# Altium PCB Recovery.PcbDoc
Units mil, origin at the board's own origin, x right, y up, seen from the top; angles counter-clockwise.
Board outline 2095 x 1230 mil, 4 copper layers (Top, GND, POWER, Btm), stack 30.617 mil thick; 21 components, 22 nets, 91 pads, 15 vias.
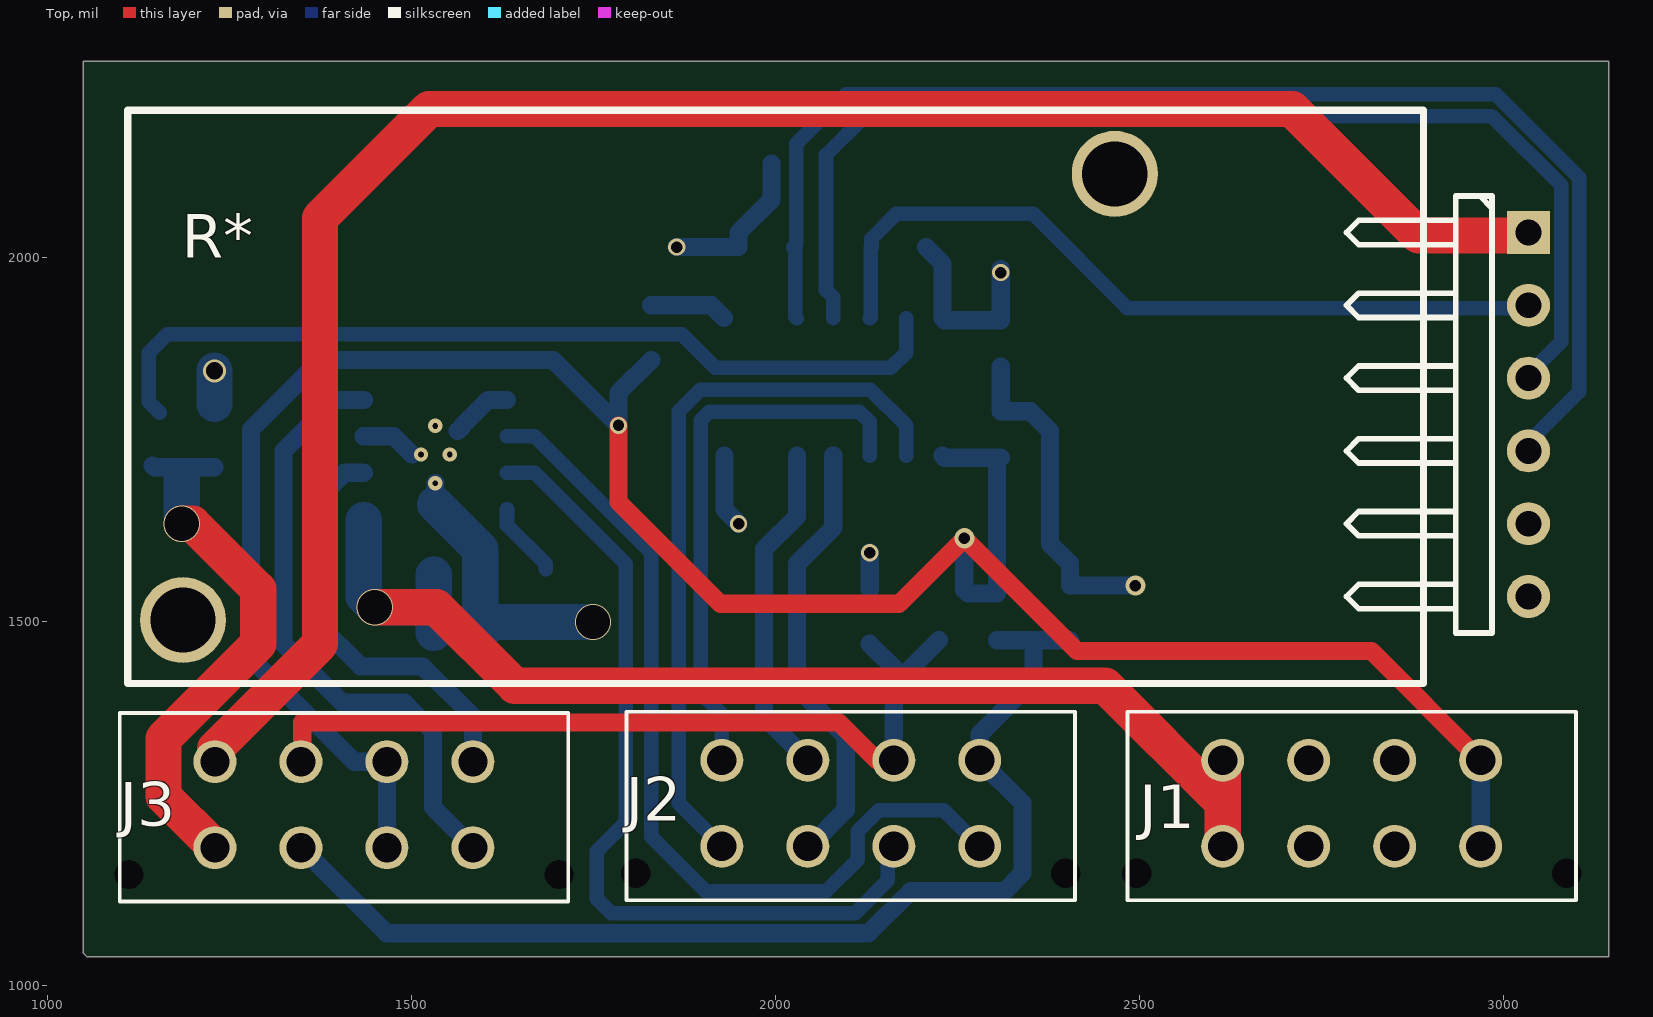
[diagram p0: Top view]
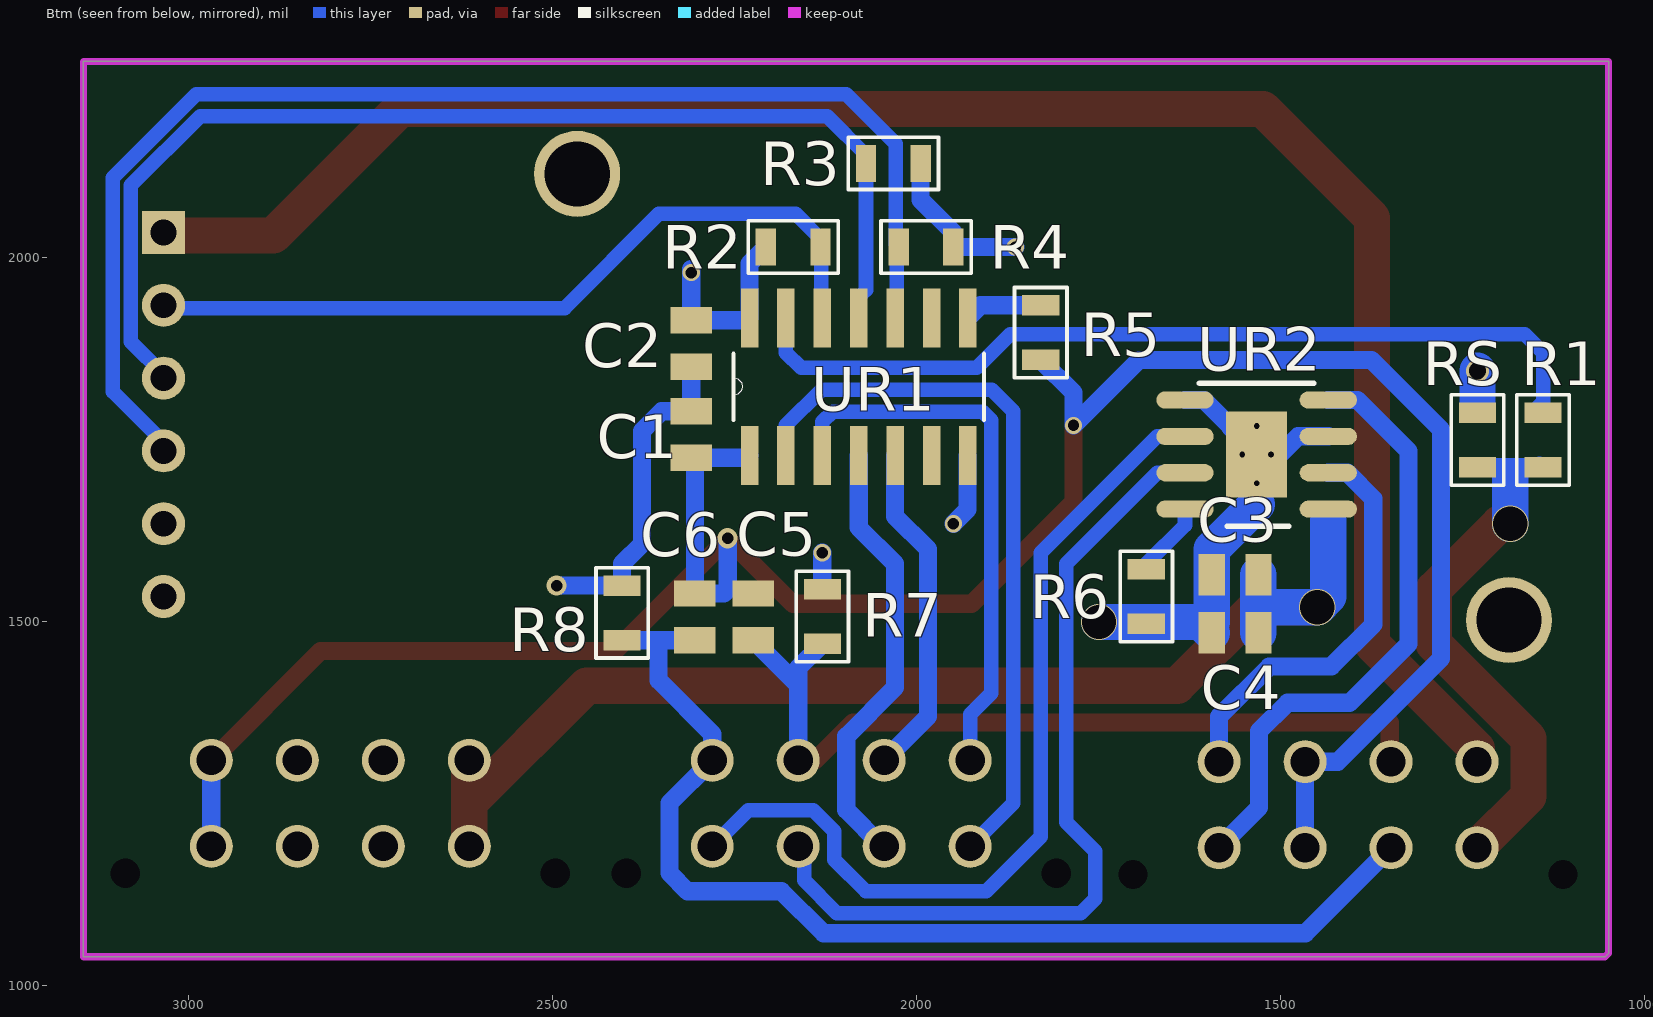
[diagram p1: Btm view, seen from below]
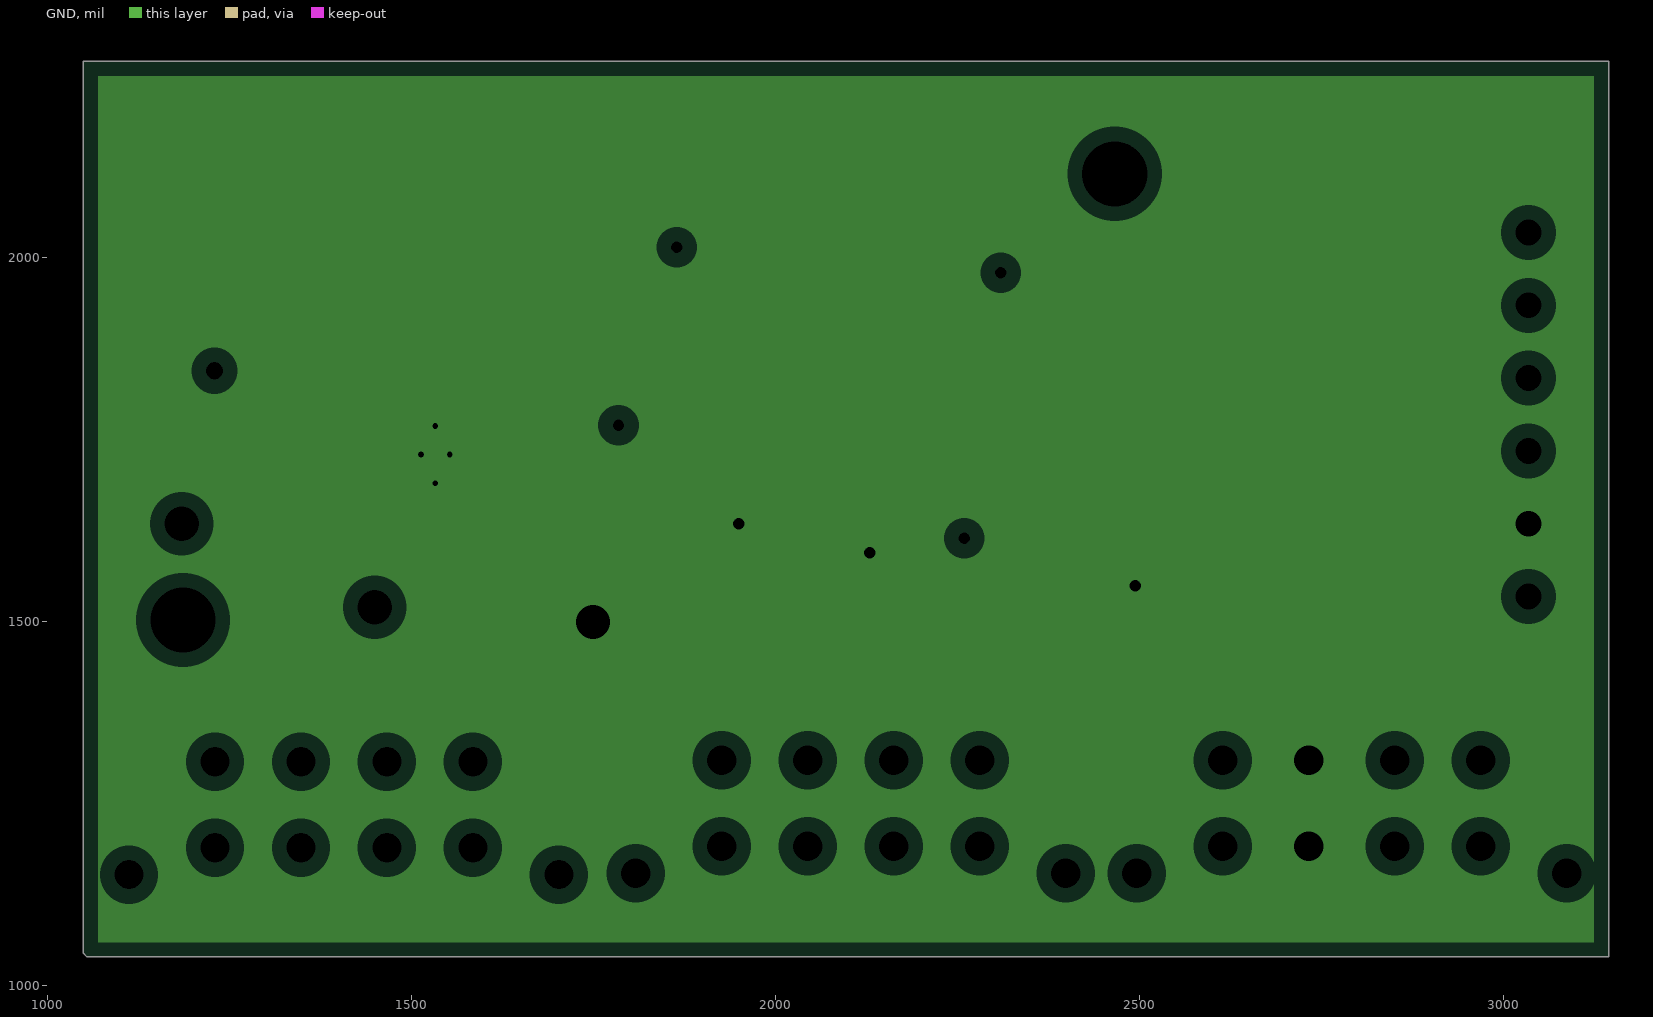
[diagram p2: GND, clearances drawn from the general rule]
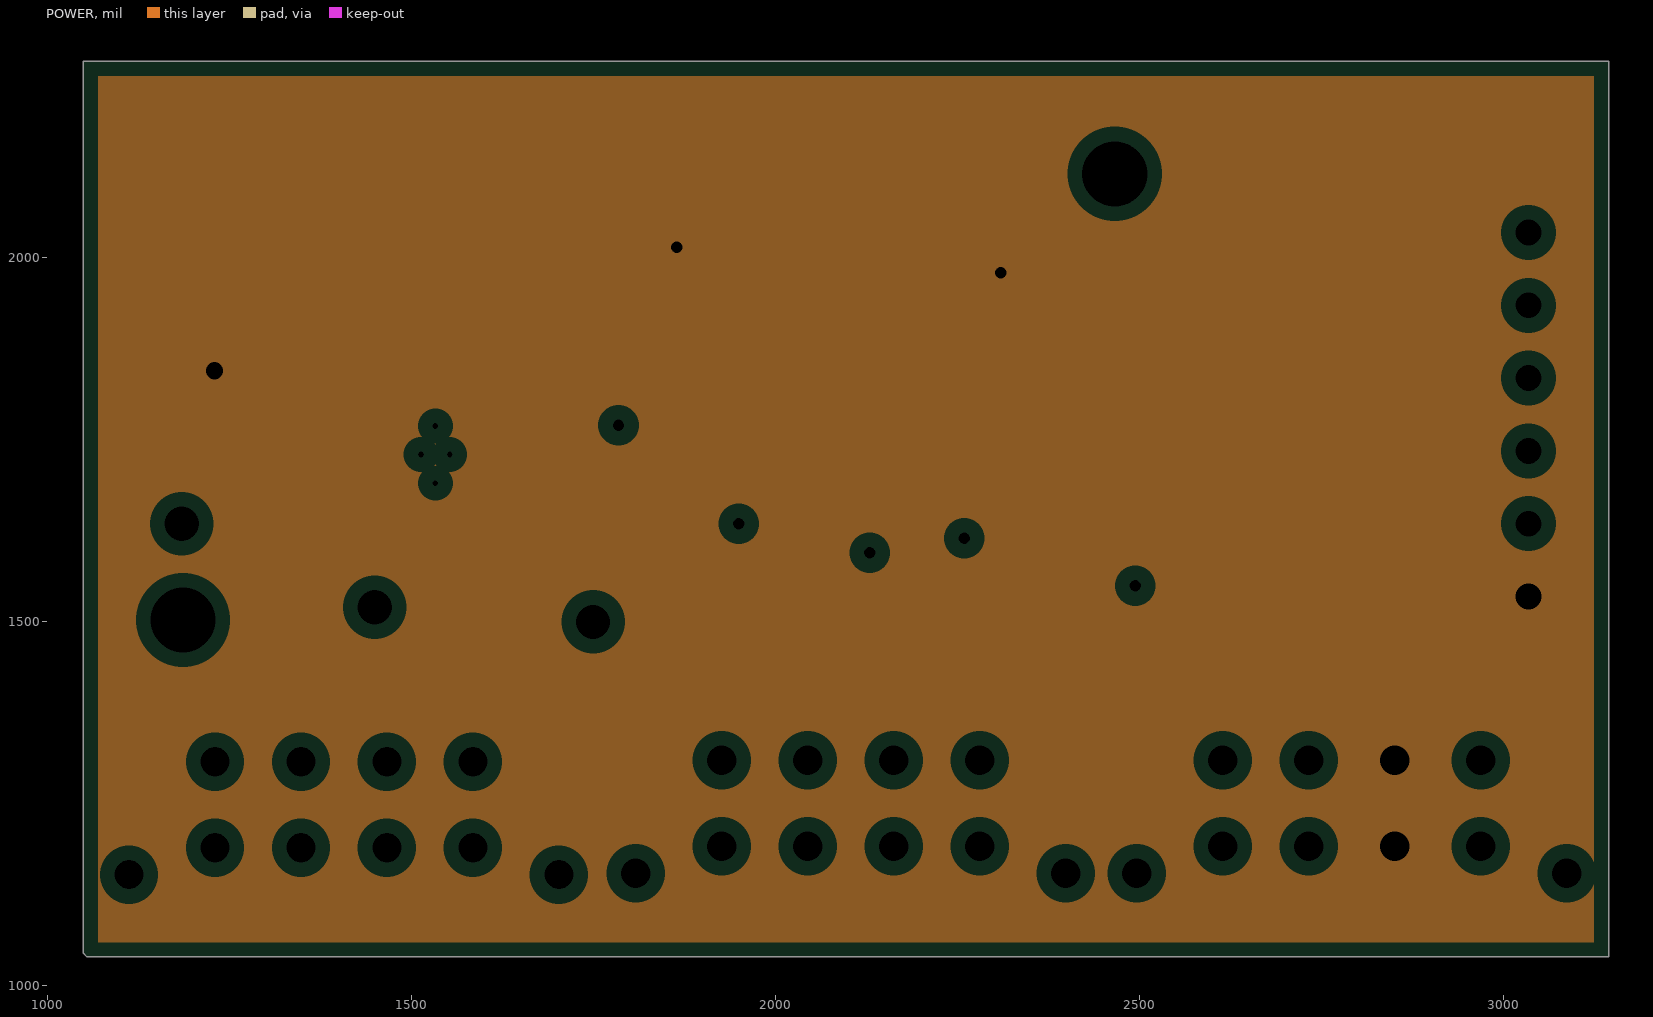
[diagram p3: POWER, clearances drawn from the general rule]

## Layer stack, top to bottom
Top Solder: solder mask 0.4, Solder Resist, Dk 3.5
Top: signal copper 1.4
D1: core 10, FR-4, Dk 4.2
GND: plane copper 1.4, net GND
D2: prepreg 5, FR-4, Dk 4.2
POWER: plane copper 1.417, net 5V
D3: core 10, Dk 4.2
Btm: signal copper 1.4
Btm Solder: solder mask 0.4, Solder Resist, Dk 3.5

## Board outline
1050,1045 1055,1040 3145,1040 3145,2270 1050,2270

## Design rules (kind name [scope] priority, off if disabled: settings)
Clearance [All] p1: gap=5 ignorepadtopadclearanceinfootprint=TRUE
PlaneClearance [All] p1: clearance=20
PlaneConnect [All] p1: planeconnectstyle=Relief reliefexpansion=20 reliefentries=4 reliefconductorwidth=10 reliefairgap=10
PolygonConnect [All] p1: connectstyle=Relief reliefconductorwidth=10 reliefentries=4 polygonreliefangle="90 Angle" airgapwidth=10
RoutingVias [All] p1: holewidth=28 width=50 viastyle="Through Hole" minholewidth=28 minwidth=50 maxholewidth=28 maxwidth=50
SolderMaskExpansion [All] p1: expansion=4
Width [All] p1: maxlimit=50 minlimit=10 preferedwidth=20
28 further rules are at their usual default settings.

## Components (designator, comment, footprint, x,y, rotation, side; value= is the part's Value field where it differs from the comment)
C1 "Cap" C0805C475K9RACAUTO 2310,1757.5 r270 bottom value=0.1uF
C2 "Cap" C0805C475K9RACAUTO 2310,1882.5 r270 bottom value=0.1uF
C3 "Cap" C0805C475K9RACAUTO 1563,1565 r180 bottom value=47uF
C4 "Cap" C0805C475K9RACAUTO 1563,1485 r180 bottom value=0.1uF
C5 "Cap" C0805C475K9RACAUTO 2225,1507 r90 bottom value=100nF
C6 "Cap" C0805C475K9RACAUTO 2305,1507 r270 bottom value=100nF
J1 "MicroFit 8-Pos Connector" MICROFIT-8POS 2792.17,1117.87 r180 top
J2 "MicroFit 8-Pos Connector" MICROFIT-8POS 2104.06,1117.87 r180 top
J3 "MicroFit 8-Pos Connector" MICROFIT-8POS 1407.83,1115.98 r180 top
R1 "Res" "RES 0805" 1140,1750 r270 bottom value=2K2
R2 "Res" "RES 0805" 2170,2015 r0 bottom value=2K2
R3 "Res" "RES 0805" 2032.5,2130 r180 bottom value=2K2
R4 "Res" "RES 0805" 1987.5,2015 r180 bottom value=2K2
R5 "Res" "RES 0805" 1830,1897.5 r90 bottom value=10K
R6 "Res" "RES 0805" 1685,1535 r90 bottom value=470
R7 "Res" "RES 0805" 2130,1507.5 r270 bottom value=4.7k
R8 "Res" "RES 0805" 2405,1512.5 r270 bottom value=4.7k
R* "Raven3" RAVEN3 2000.75,1809.15 r0 top
RS "Res" "RES 0805" 1230,1750 r90 bottom value=4.7
UR1 "TXB0104DR" SOIC127P600X175-14N 1930,1917.5 r90 bottom
UR2 "DRV8871DDA" DDA0008H_N 1533.43,1730 r180 bottom value=Value

## Footprints (in the part's own frame and the unit in brackets; to place one, negate y for a bottom-side part, rotate by r counter-clockwise, add the part's x,y. Pads: shape width x height; smd on the part's side, far side on the other; paste and mask are expansions set on the pad)
C0805C475K9RACAUTO [mil] "CAPC2013X88N"
  rect 36x57 smd: 1(-32,0) 2(32,0)
DDA0008H_N [mm]
  oval 2x0.6 smd paste-0.102 mask+0.051: 1(-2.5,1.905) 2(-2.5,0.635) 3(-2.5,-0.635) 4(-2.5,-1.905) 5(2.5,-1.905) 6(2.5,-0.635) 7(2.5,0.635) 8(2.5,1.905)
  rect 2.13x3 smd paste-0.102 mask+0.051: 9(0,0)
  silkscreen extent -1.99,-2.5 1.99,2.49, body extent 0,0 0.25,0.25, height 0.25
MICROFIT-8POS [mm]
  round 1.5 hole 1.02 unplated: 1(-4.5,-4.88) 2(-4.5,-1.88) 3(-1.5,-4.88) 4(-1.5,-1.88) 5(1.5,-4.88) 6(1.5,-1.88) 7(4.5,-4.88) 8(4.5,-1.88)
  round 0 hole 1.02 unplated: NONE(-7.5,-0.94) NONE(7.5,-0.94)
  silkscreen extent -7.83,-6.58 7.83,0
RAVEN3 [mm]
  rect 1.5x1.5 hole 0.9: 1(26.27,5.737)
  round 1.5 hole 0.9: 2(26.27,3.197) 3(26.27,0.657) 4(26.27,-1.883) 5(26.27,-4.423) 6(26.27,-6.963)
  round 3 hole 2.27: GND(-20.675,-7.785) GND(11.835,7.785)
  silkscreen extent -22.6,-10 25,10
"RES 0805" [mil]
  rect 28x51 smd: 1(-37.5,0) 2(37.5,0)
  silkscreen extent -62,-36 62,36
SOIC127P600X175-14N [mil]
  rect 81x24 smd: 1(-189,300) 2(-189,250) 3(-189,200) 4(-189,150) 5(-189,100) 6(-189,50) 7(-189,0) 8(0,0) 9(0,50) 10(0,100) 11(0,150) 12(0,200) 13(0,250) 14(0,300)
  silkscreen extent -140,-22 -49,322

## Part data
J1 J2 J3: library part "Micro-Fit 8Pos", "Molex MicroFit 8-Pos Connector", DigiKey PN=WM2651-ND, URL=https://www.digikey.com/products/en?WT.z_cid=sp_900_0310_buynow&keywords=430450813
R*: "Altimeter"
UR1: "4-Bit Bidirectional Voltage-Level Shifter with Auto Direction Sensing and +/-15 kV ESD Protect 14-SOIC -40 to 85", Package="SOIC-14 Texas Instruments", Availability=Good, MF="Texas Instruments", MP=TXB0104DR, Price="0.76 USD", SnapEDA_Link=https://www.snapeda.com/symbols-footprints/TXB0104DR/Texas%20Instruments/view-part/?ref=snap
UR2: "Imported", Manufacturer="Texas Instruments", PartNumber=DRV8871DDAR, Alternate_PartNumber=DRV8871DDA, CompType=IC, MountType=SMT, PackageReference=DDA0008H, PIN_COUNT=9, RefDes=RefDes, Type=TYPE

## Via types
v1: diameter 23.62, hole 15.75, Top to Btm, 5 vias
v2: diameter 19.68, hole 7.87, Top to Btm, 4 vias
v3: diameter 50, hole 47.24, Top to Btm, 3 vias
v4: diameter 27.56, hole 15.75, Top to Btm, 2 vias
v5: diameter 31.5, hole 23.62, Top to Btm, 1 vias

## Nets (pads, with @x,y where several pads share a name; then routed paths per layer and width w, separated by ;. In a path a pad name is that pad's centre, name@x,y a point inside that pad or via, vN(x,y) a via of type N, cw(c..) or ccw(c..) an arc to the next point about the centre after c; other vN are vias at no path point)
3V3: C1.2 C5.2 C6.1 J1.1 J1.2 J3.3 J3.4 R5.1 UR1.1 | length 3385.7
  Top w25: v1(1785,1770) 1785,1665 1925,1525 2170,1525 v4(2260,1615) 2415,1460 2819.33,1460 J1.1
  Btm w25: J3.4 J3.3 1421.89,1308.11 1280,1450 1280,1764.5 1375.5,1860 1695,1860 v1(1785,1770) 1785,1815 R5.1 ; UR1.1 2233,1725.5 C1.2 2305,1720.5 C6.1 2265,1539 2260,1544 v4(2260,1615) ; J1.2 J1.1
5V: C2.1 J1.3 J1.4 R2.2 R3.2 R4.2 R*.6 RS.2 UR1.14 | length 522.2
  Btm w25: v1(1865,2015) R4.2 1950,2035 1995,2080 R3.2 ; R2.2 2230,1992.5 UR1.14 2233,1914.5 C2.1 v1(2310,1980) v1@2310,1985
  Btm w50: RS.2@1230,1800 v5(1230,1845)
24V: C3.2 C4.2 J1.7 J1.8 UR2.5 | length 1675.8
  Top w50: v3(1450,1520) 1535,1520 1642.5,1412.5 2453.44,1412.5 2615,1250.94 ; J1.8 2615,1250.94 ; J1.7 2615,1250.94
  Btm w50: 1435,1640 1435,1535 v3(1450,1520) 1525,1520 ; C4.2 C3.2
EMatch1: J3.7 R*.1 | length 2584.9
  Top w50: J3.7 1230.67,1325.67 1375,1470 1375,2055 1524.7,2204.7 2710.3,2204.7 2884.15,2030.85 R*.1@3019.25,2030.85
EMatch2: J3.8 R1.2 RS.1 | length 747
  Top w50: v3(1185,1635) 1200,1635 1290,1545 1290,1470 1160,1340 1160,1260.67 J3.8
  Btm w25: R1.2@1145,1715 1147.5,1712.5 1177.5,1712.5 ; 1185,1700 1185,1705 1177.5,1712.5 ; RS.1 1177.5,1712.5
  Btm w50: v3(1185,1635) 1185,1700
GND: C1.1 C2.2 C3.1 C4.1 J1.5 J1.6 R6.1 R7.1 R8.1 R*.5 UR1.7 UR2.1 UR2.7 UR2.9 | length 1160.1
  Btm w25: UR2.7 1476.34,1755 UR2.9@1501.34,1730 ; 1533.43,1661.57 v2(1533.43,1690.63) ; UR2.9@1564.26,1762.34 1569.98,1768.06 1569.98,1769.21 1605.77,1805 UR2.1 ; C4.1 C4.1@1595,1500 ; UR1.7@1930.5,1728.5 1930.5,1654.5 v1(1950,1635) ; R7.1 v1(2130,1595) ; C2.2 C1.1 2350.5,1789.5 2377.75,1762.25 2377.75,1607.25 2405,1580 R8.1 v4(2495,1550)
  Btm w50: 1533.43,1661.57 1595,1600 C3.1 C4.1@1595,1500 ; C4.1 1610,1500 v3(1750,1500)
  other v2: 1513.74,1730 1553.11,1730 1533.43,1769.37
GPIO1: J2.8 UR1.2 | length 1008.1
  Btm w20: J2.8 1868,1250.78 1868,1789.71 1897.29,1819 2131,1819 2180,1770 UR1.2
GPIO2: J2.7 UR1.3 | length 768.4
  Btm w20: J2.7 1926.89,1373.11 1898,1402 1898,1777.28 1909.72,1789 2116,1789 2130,1775 UR1.3
GPIO3: J2.6 UR1.4 | length 607.9
  Btm w25: J2.6 2047.11,1191.89 2097.03,1241.81 2097.03,1342.97 2030,1410 2030,1580 2080,1630 UR1.4
GPIO4: J2.5 UR1.5 | length 462
  Btm w25: UR1.5 2030,1645 1985,1600 1985,1370 J2.5
LimSwitchNC: C5.1 J2.3 J3.5 R7.2 | length 1149.9
  Top w25: J3.5 1350.67,1310 1350.67,1362.03 2087.97,1362.03 2140,1310 J2.3
  Btm w25: R7.2 2163.11,1436.89 2163.11,1413.11 ; J2.3 2163.11,1413.11 ; C5.1 2163.11,1413.11
LimSwitchNO: C6.2 J2.1 J3.6 R8.2 | length 1549
  Btm w25: J3.6 1466.28,1072.5 2128.46,1072.5 2185.96,1130 2315,1130 2340,1155 2340,1251.22 J2.1 2281.22,1346.22 2355,1420 2355,1475 ; C6.2 2355,1475 ; R8.2 2355,1475
MIN1: J2.4 UR2.3 | length 1168.7
  Btm w20: UR2.3 1670,1705 1795,1580 1795,1225 1755,1185 1755,1120 1775,1100 2110,1100 2155,1145 2155,1183.78 J2.4
MIN2: J2.2 UR2.2 | length 1226.1
  Btm w20: UR2.2 1670,1755 1830,1595 1830,1205 1905,1130 2070,1130 2113.58,1173.58 2113.58,1212.4 2142.6,1241.42 2231.69,1241.42 J2.2
MOUT1: J3.1 UR2.6 | length 575.3
  Btm w25: UR2.6 1408.92,1705 1373.13,1669.21 1373.13,1496.87 1431,1439 1516,1439 1585,1370 J3.1
MOUT2: J3.2 UR2.8 | length 841.5
  Btm w25: UR2.8 1395,1805 1325,1735 1325,1470 1406,1389 1491,1389 1530,1350 1530,1245 J3.2
NetR1_1: R1.1 UR1.13 | length 1214.3
  Btm w20: R1.1@1155,1787.5 1140,1802.5 1140,1870 1165,1895 1871.72,1895 1917.72,1849 2159,1849 2180,1870 UR1.13
NetR2_1: R2.1 R*.2 UR1.12 | length 1064.6
  Btm w20: UR1.12 2131.25,1918.75 2131.25,2013.75 R2.1 2132.5,2026.5 2166.5,2060.5 2354.5,2060.5 2484.15,1930.85 R*.2@3019.25,1930.85
NetR3_1: R3.1 R*.3 UR1.11 | length 1583.1
  Btm w20: UR1.11 2080,1946 2070,1956 R3.1 2070,2141.5 2123.5,2195 2984.64,2195 3080,2099.64 3080,1885 3035,1840 R*.3
NetR4_1: R4.1 R*.4 UR1.10 | length 1809.6
  Btm w20: UR1.10 2028,1919.5 2028,2012 R4.1 2029,2019 2029,2156.78 2097.22,2225 2990,2225 3105,2110 3105,1816.6 R*.4@3019.25,1730.85
NetR5_2: R5.2 UR1.8 | length 107.2
  Btm w25: R5.2 1912.5,1935 UR1.8
NetR6_2: R6.2 UR2.4 | length 104.5
  Btm w20: UR2.4 1631.85,1633.15 1685,1580 R6.2
pads on no net: J1.NONE J2.NONE J3.NONE R*.GND UR1.6 UR1.9

## Polygon pours and split planes (outlines as drawn)
GND on GND (split plane): 3124.9,1060.1 1070.1,1060.1 1070.1,2249.9 3124.9,2249.9
5V on POWER (split plane): 3124.9,1060.1 1070.1,1060.1 1070.1,2249.9 3124.9,2249.9

## Keep-outs
Btm:
  the board outline again, w10

## Dimensions
1050,2270 to 1055,1040 on Top Overlay
1050,1045 to 3145,1040 on Top Overlay